# Altium PCB esp32.PcbDoc (part 3 of 3)
Units mil, origin at the board's own origin, x right, y up, seen from the top; angles counter-clockwise.
Board outline 2755 x 1098 mil, 4 copper layers (L1, L2, L3, L4), stack 61.745 mil thick; 63 components, 73 nets, 303 pads, 170 vias.
Unrouted connection lines stored in the file: 4.
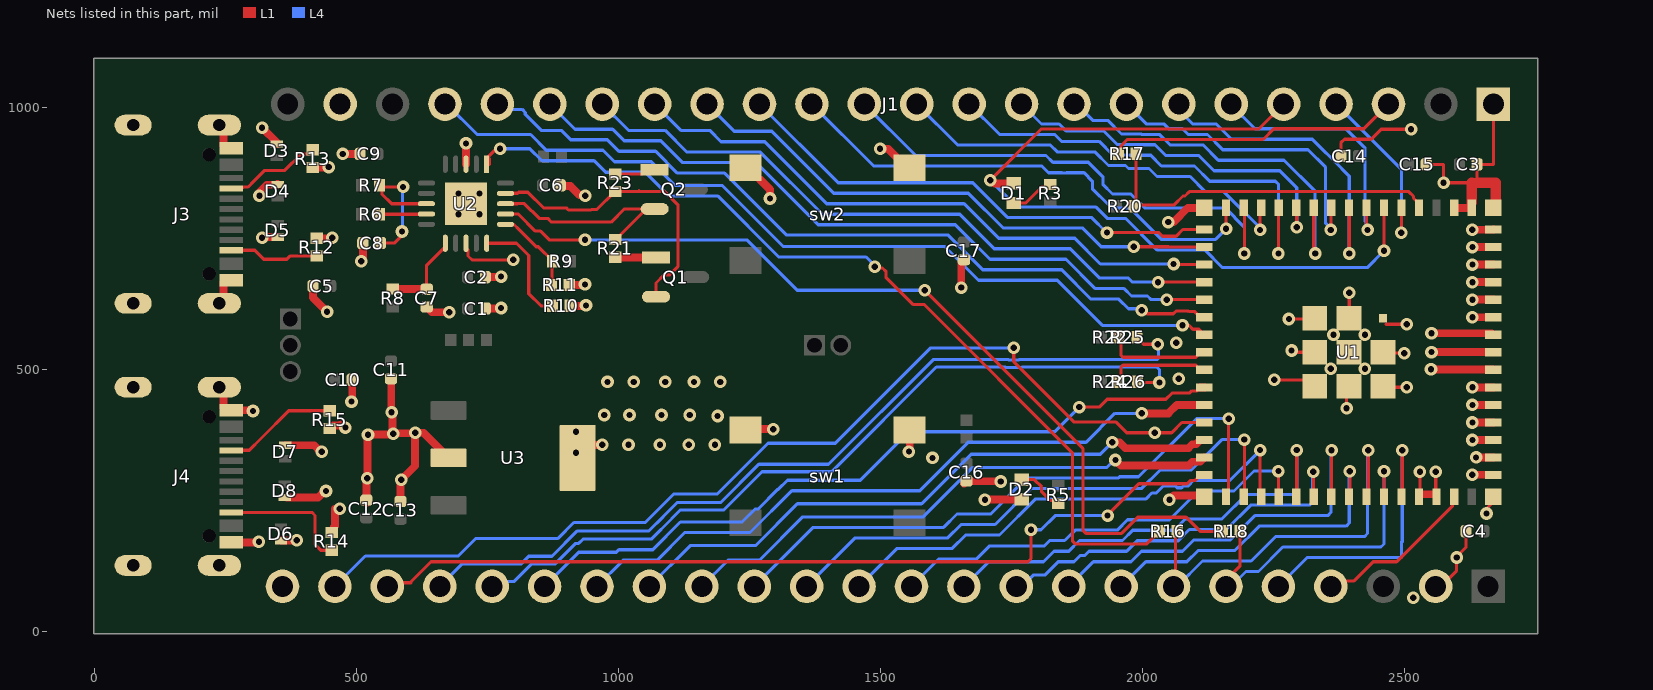
[diagram p4: the nets of this part, all layers, seen from the top]

## Via types
v1: diameter 24, hole 12, L1 to L4, tented both sides, 169 vias
v2: diameter 24/24/24 (per signal layer), hole 12, L1 to L4, tented both sides, 1 vias

## Nets (pads, with @x,y where several pads share a name; then routed paths per layer and width w, separated by ;. In a path a pad name is that pad's centre, name@x,y a point inside that pad or via, vN(x,y) a via of type N, cw(c..) or ccw(c..) an arc to the next point about the centre after c; other vN are vias at no path point) (continued)
CON_ESP_USB_N: pad.21 R25.1 | length 1626.1
  L1 w6.23: R25.1@1989,561 1989,559.82 1996.51,552.3 1997.7,552.3 2002,548 v1(2029,548)
  L4 w6: pad.21@659,86 702.11,129.11 807.89,129.11 808.49,128.51 813.65,128.51 828.48,143.35 873,143.35 921.43,191.78 1058.22,191.78 1085.05,218.6 1085.05,219.17 1111.88,246 1195,246 1267.84,318.85 1400.72,318.85 1600.49,518.61 1743.7,518.61 1744.43,517.89 1763.57,517.89 1764.3,518.61 2026.85,518.61 2030.5,522.26 2030.5,546.5 v1(2029,548)
CON_ESP_USB_P: pad.20 R26.1 | length 1531.7
  L1 w6.23: R26.1@1990,476 1991,475 v1(2032,475)
  L4 w6: pad.20@759,101.63 pad.20@759,86 768.09,95.09 800.34,95.09 834.37,129.11 879.33,129.11 918.21,168 924,168 932.21,176.21 1062.79,176.21 1102,215.43 1102,216 1117.77,231.77 1200.89,231.77 1273.74,304.61 1406.61,304.61 1606.39,504.39 1737.8,504.39 1738.53,503.65 1769.47,503.65 1770.2,504.39 2026.85,504.39 2032,499.24 v1(2032,475)
CON_GPIO0: J1.3 R17.1 | length 560.2
  L1 w6: R17.1@1953.52,911.63 1959.15,917.26 1959.15,926.9 1970.69,938.45 2229.73,938.45 2250.28,959 2422,959 J1.3@2469,1006
DTR_FTDI: Q2.2 R21.2 U2.18 | length 387.3
  L1 w6: U2.18@790.04,815.66 790.38,816 806.93,816 807.16,816.23 820.49,816.23 848.72,788 865.18,788 872.18,781 985.85,781 1010.85,806 Q2.2@1053.17,806 ; R21.2@994,748.01 995.18,748.01 Q2.2@1053.17,806 ; Q2.2@1069,806 Q2.2@1053.17,806
ESP_USB_N: R22.2 R25.2 U1.23 | length 201.4
  L1 w6.23: R25.2@1954.98,561 1958.63,557.35 1958.63,526.57 1962.32,522.89 2040.38,522.89 2101.54,522.92 2105.19,526.57 2105.19,527.78 2109.94,532.54 U1.23@2117.82,532.54
ESP_USB_P: R24.2 R26.2 U1.24 | length 194.1
  L1 w6.23: R26.2@1955.98,476 1955.98,480.32 1958.63,482.97 1958.63,504.35 1962.28,508 2101.54,508 2105.19,504.35 2105.19,503.83 2109.94,499.07 U1.24@2117.82,499.07
FTDI_RESET: C7.2 R8.2 U2.11 | length 156.7
  L1 w6: C7.2@634,652.93 634,698.65 U2.11@666.48,731.13
  L1 w15: R8.2@569,653.01 R8.2@569,653.01 633.96,652.97 C7.2@634,652.93
FTDI_USB_N: R6.2 U2.9 | length 89.3
  L1 w6.23: R6.2@544,796 U2.9@633.27,796
FTDI_USB_P: C8.2 R7.2 U2.8 | length 297.5
  L1 w6.23: C8.2@545.93,741 572,741 587,756 v1(587,763) ; v1(589,848) 547,848 R7.2@544,851 548.81,846.19 548.81,834.19 567,816 609.63,816 U2.8@633.59,816
  L4 w6: v1(587,763) 588,764 588,847 v1(589,848)
GND: C1.1 C2.1 C3.1 C4.1 C5.1 C6.1 C7.1 C8.1 C9.1 C10.1 C11.1 C12.1 C13.1 C14.1 C15.1 C16.1 C17.1 D2.1 D3.1 D4.1 D5.1 D6.1 D7.1 D8.1 J1.1 J1.23 J3.A1B12 J3.B1A12 J3.S1 J3.S2 J3.S3 J3.S4 J4.A1B12 J4.B1A12 J4.S1 J4.S2 J4.S3 J4.S4 pad.2 pad.24 R10.1 R11.1 R12.1 R13.1 R14.1 R15.1 sw1.3 sw1.4 sw2.3 sw2.4 U1.1 U1.2 U1.42 U1.43 U1.46 U1.47 U1.48 U1.49 U1.50 U1.51 U1.52 U1.53 U1.54 U1.55 U1.56 U1.57 U1.58 U1.59 U1.60 U1.61 U1.62 U1.63 U1.64 U1.65 U1.66 U1.67 U1.68 U1.69 U1.70 U1.71 U1.72 U1.73 U2.3 U2.13 U2.21 U3.2 U3.4 | length 4624.7
  L1 w6: U2.13@712.91,728.72 712.91,716.38 720.71,708.58 798.72,708.58 v1(799,708.86) ; v1(2251,480) 2314.45,480 U1.73@2323.45,471 ; v1(2279,596) 2328.45,596 U1.71@2328.45,597.5 ; v1(2284,536) 2280.54,532.54 U1.72@2328.45,532.54 ; U1.72@2319.45,522 U1.72@2328.45,531 ; C14.1@2378.07,907 2378.07,932 2385.07,939 2435.8,939 2454.8,958 v1(2512,958) ; v1(2389,426) U1.70@2389,465.45 ; U1.69@2394,606.55 v1(2394,646) ; U1.67@2459.55,531 v1(2499,531) ; U1.68@2464.55,466 v1(2504,466) ; 2464.55,586 v1(2504,586) ; U1.42@2528.99,262.2 v1(2528.99,304.87) ; C15.1@2540.93,891 2574,891 v1(2574,856) 2627.66,856 2637.86,856 2637.86,890.86 C3.1@2638,891 2669,891 J1.1@2669,1006 ; pad.2@2559,86 2569,86 2599,116 v1(2599,141) 2599,143.04 2617.07,161.11 C4.1@2617.07,191 ; U1.43@2559,261.82 v1(2558.99,304.87) ; v1(2656,225) 2656,233.94 2679,256.94 U1.65@2669,256.94 ; U1.62@2669,808.13 U1.62@2674,808.13
  L1 w15: J4.S1@238.57,466.08 246.07,458.58 246.07,426.3 250.38,421.98 J4.A1B12@261.2,421.98 v1@301.29,421.98 ; J3.S2@238.57,625.92 246.07,633.42 246.07,665.7 250.38,670.02 J3.B1A12@261.2,670.02 ; J3.S1@238.57,966.08 246.07,958.58 246.07,926.3 250.38,921.98 J3.A1B12@261.2,921.98 ; J4.B1A12@261.2,170.02 v1@314,170.02 ; v1(315,831) 315,837.75 329.44,852.18 349.39,852.18 D4.1@350,852.8 D4.1@349.39,853.41 ; v1@320,752.2 D5.1@350,752.2 ; v1(320,961) 348,933 D3.1@348,929.8 ; D6.1@356,173.2 v1@386,173.2 ; D7.1@364,355.18 419.38,355.18 431.56,343 v1(434,343) ; D8.1@367.31,255.41 426.97,255.41 439.56,268 v1(442,268) ; R13.1@417,884.99 v1@447,884.99 ; C5.1@417.14,659 417.14,636.86 v1(444,610) ; R12.1@424,750.02 v1@454,750.02 ; R15.1@449,386.99 454.89,392.88 468.06,392.88 470.18,395 473,395 v1(479,389) ; R14.1@453,189.02 454.18,189.02 457.31,192.15 457.31,199.24 459,200.93 v1@459,234 ; v1(474,911) C9.1@507.07,911 ; v1@491.93,439.92 C10.1@491.93,480 ; v1(509,706) 509,708.44 512.56,712 512.56,736.69 512.07,737.18 C8.1@512.07,741 ; C12.1@519,245.13 C12.1@519,250.57 v1@519,290.65 ; v1(520.4,292.05) 521.2,292.85 521.2,374.2 v1(522,375) 523,376 569,376 v1(570,377) ; C11.1@566,482.07 566.5,481.57 566.5,418.5 v1(567,418) 568.5,416.5 568.5,378.5 v1(570,377) ; C13.1@584,247.93 v1@584,288.01 ; v1(585.4,289.41) 612,316.01 v1(612,379) ; C7.1@634,619.07 644.07,609 v1(677,609) ; U3.2@675.97,331 627.97,379 v1(612,379) ; U2.3@709,891.41 v1@709,920.43 ; C1.1@745.93,616 v1@775.93,616 ; C2.1@745.93,676 746.42,676.49 775.44,676.49 v1(775.93,676.98) ; C6.1@889,851 890.44,849.56 908.52,849.56 925.35,832.72 934.6,832.72 v1(936.33,831) ; R11.1@906.01,661 v1@936.01,661 ; R10.1@908.02,621 v1@938.02,621 ; v1(919,341) 919,346.02 928.98,356 v1(969,356) ; sw1.4@1242.5,384.58 1243.92,386 v1(1295,386) ; sw2.4@1242.5,884.58 1247.43,884.58 1289,843.01 v1(1289,826) ; v1(1499,921) 1514.16,921 1550.57,884.58 sw2.3@1555.5,884.58 ; v1@1555.5,344.5 sw1.3@1555.5,384.58 ; v1(1654,656) 1654,704.07 1654.69,704.76 1654.69,705.94 1657.82,709.07 C17.1@1659,709.07 ; C16.1@1659,282.14 C16.1@1664,287.14 1664.57,286.57 1728.43,286.57 v1(1729,286) ; v1(1699,251) 1699.65,251.65 1768.35,251.65 D2.1@1769,252.3 ; v1(2049,781) 2059,781 2086.13,808.13 U1.63@2117.82,808.13 ; v1(2051,251) 2059.28,259.28 2115.49,259.28 U1.64@2117.82,256.94 ; U1.42@2527.27,256.94 2527.27,261.44 2527.64,261.82 U1.43@2559,261.82 ; v1(2550,500) 2668.07,500 U1.52@2669,499.07 ; v1(2551,533) 2668.54,533 U1.53@2669,532.54 ; v1(2551,569) 2666,569 U1.54@2669,566 ; U1.2@2594.2,808.13 U1.1@2627.66,808.13 ; v1(2628.66,766.41) 2668.63,766.41 U1.60@2669,766.79 ; v1(2629,299) 2668.28,299 U1.46@2669,298.28 ; v1(2629.03,365.21) U1.48@2669,365.21 ; v1(2629.03,398.68) U1.49@2669,398.68 ; v1(2629.03,432.14) U1.50@2669,432.14 ; v1(2629.03,465.61) U1.51@2669,465.61 ; v1(2629.03,599.46) U1.55@2669,599.46 ; v1(2629.03,632.93) U1.56@2669,632.93 ; v1(2629.03,666.39) U1.57@2669,666.39 ; v1(2629.03,699.86) U1.58@2669,699.86 ; v1(2629.03,733.32) U1.59@2669,733.32 ; v1(2636,332) 2668.75,332 U1.47@2669,331.75 ; v1(570,377) 571,378 611,378 v1(612,379)
  L1 w20: U1.1@2627.66,819 2627.66,856 ; 2637.86,856 2674,856 U1.62@2674,808.13
  other v1: 2516,64 314,171 386,174.19 468,234 1599,331 1554.1,343.1 1019,356 1079,356 1134,356 1184,356 919,381 1189,411 973,413 1021,413 1082,413 1136,413 302.68,420.59 490.53,438.52 979,476 1029,476 1089,476 1144,476 1194,476 2069,482 2359,501 2424,501 2064,551 2364,566 2424,566 775.93,616.98 938.02,621.98 936.01,661.98 320,751.22 454,751 694.63,795.66 734.63,795.66 694.63,835.66 734.63,835.66 447,885.98 709,931
GPIO0: R17.2 R20.2 U1.4 | length 672.1
  L1 w6: R20.2@1984,811 R20.2@1987.53,814.53 ; R17.2@1987.53,911.63 R20.2@1987.53,814.53 ; U1.4@2527.27,808.13 2524.39,811 2524.39,818.87 2516.68,826.59 2516.68,830.09 2507.76,839 2089,839 2080.63,830.63 2076.81,830.63 2059.91,813.73 1988.34,813.73 R20.2@1987.53,814.53
GPIO1: J1.4 U1.5 | length 344.8
  L1 w6: v1(2493.5,760.5) 2493.65,760.65 2493.65,807.98 U1.5@2493.8,808.13
  L4 w6: J1.4@2369,1006 2493.5,881.5 v1(2493.5,760.5)
GPIO2: D1.1 J1.5 U1.6 | length 1583.5
  L1 w6: v1(1709,861) 1806.45,958.45 2221.45,958.45 J1.5@2269,1006 ; v1@2460.34,726.2 U1.6@2460.34,808.13
  L1 w15: v1(1709,861) 1711.44,861 1717.72,854.72 D1.1@1754,854.7
  L4 w6: v1(1709,861) 1760,810 1910.26,810 1932.26,788 1967.18,788 2027.18,728 2118.17,728 2152.17,694 2428.34,694 v1(2460.44,726.1)
GPIO3: J1.6 U1.7 | length 492.4
  L1 w6: U1.7@2426.87,808.13 2426.87,768.13 v1(2429,766)
  L4 w6: J1.6@2169,1006 2169,1004.18 2214.18,959 2387.72,959 2424,922.72 2424,783 2426.32,780.68 2426.32,768.68 v1(2429,766)
GPIO4: J1.7 U1.8 | length 624.2
  L1 w6: U1.8@2393.41,808.13 2394,807.54 2394,741 v1(2394,721)
  L4 w6: J1.7@2069,1006 2069,994.18 2095.18,968 2140.53,968 2169.53,939 2323.72,939 2379.38,883.34 2380,883.34 2380,882.56 2394,868.56 v1(2394,721)
GPIO5: J1.8 U1.9 | length 596
  L1 w6: v1(2359,766) 2359,807.18 U1.9@2359.94,808.13
  L4 w6: J1.8@1969,1006 2006.62,968.38 2040.16,968.38 2049.53,959 2075.9,959 2086.9,948 2123.72,948 2152.72,919 2315.43,919 2349,885.43 2349,778.86 2359,768.86 v1(2359,766)
GPIO6: J1.9 U1.10 | length 735.8
  L1 w6: U1.10@2326.48,808.13 2326.48,723.52 v1(2329,721)
  L4 w6: J1.9@1869,1006 1873.47,1006 1904.47,975 1933.53,975 1959.53,949 1997.72,949 1998.34,948.38 2031.87,948.38 2052.25,928 2115.43,928 2144.43,899 2269.71,899 2329,839.71 v1(2329,721)
GPIO7: J1.10 U1.11 | length 704.1
  L1 w6: U1.11@2293.02,808.13 2294,807.14 v1(2294,771)
  L4 w6: J1.10@1769,1006 1807,968 1840.53,968 1853.53,955 1925.25,955 1951.25,929 1989.43,929 1990.06,928.38 2023.59,928.38 2043.96,908 2107.15,908 2136.15,879 2261.43,879 2294,846.43 v1(2294,771)
GPIO8: J1.11 U1.12 | length 872.8
  L1 w6: v1(2259,721) 2259.28,721.28 2259.28,807.85 U1.12@2259.55,808.13
  L4 w6: J1.11@1669,1006 1727,948 1832.25,948 1845.25,935 1916.96,935 1942.96,909 1975.47,909 1976.09,908.38 2015.3,908.38 2035.68,888 2098.86,888 2127.86,859 2253.14,859 2259,853.14 v1(2259,721)
GPIO9: J1.12 U1.13 | length 799.6
  L1 w6: v1(2224,766) 2224,806.04 U1.13@2226.09,808.13
  L4 w6: J1.12@1569,1006 1647,928 1823.96,928 1836.96,915 1908.68,915 1934.68,889 1967.18,889 1972.91,883.28 2012.12,883.28 2027.4,868 2090.58,868 2119.58,839 2154.71,839 2224,769.71 v1(2224,766)
GPIO10: J1.13 U1.14 | length 968.9
  L1 w6: U1.14@2192.62,808.13 2194,806.75 v1(2194,721)
  L4 w6: J1.13@1469,1006 1567,908 1815.68,908 1828.68,895 1896.47,895 1924,867.47 1924,852.83 1942.33,834.5 1977.25,834.5 2003.75,808 2157.43,808 2194,771.43 v1(2194,721)
GPIO11: J1.14 U1.15 | length 954.3
  L1 w6: v2(2159.16,768.09) U1.15@2159.16,808.13
  L4 w6: J1.14@1369,1006 1487,888 1807.4,888 1820.4,875 1846,875 1846.36,874.64 1854.64,874.64 1855,875 1888.18,875 1904,859.18 1904,844.55 1934.05,814.5 1936.79,814.5 1943.29,808 1975.47,808 2035.47,748 2139.07,748 v2(2159.16,768.09)
GPIO12: J1.15 U1.16 | length 958.5
  L1 w6: v1(1932,761) 2030.82,761 2037.82,754 2063.82,754 2076.61,766.79 U1.16@2117.82,766.79
  L4 w6: J1.15@1269,1006 1419,856 1675.82,856 1741.82,790 1901.98,790 1930.98,761 v1(1932,761)
GPIO13: J1.16 U1.17 | length 1061.8
  L1 w6: v1(1983,734) 2049,734 2049.68,733.32 U1.17@2117.82,733.32
  L4 w6: J1.16@1169,1006 1220.64,954.36 1292.36,954.36 1410.72,836 1667.53,836 1733.53,770 1884.82,770 1920.82,734 v1(1983,734)
GPIO14: J1.17 U1.18 | length 1175.6
  L1 w6: v1(2059,701) 2060.14,699.86 U1.18@2117.82,699.86
  L4 w6: J1.17@1069,1006 1119,956 1174,956 1195.64,934.36 1279,934.36 1397.36,816 1659.25,816 1725.25,750 1870.32,750 1919.32,701 v1(2059,701)
GPIO15: J1.18 U1.19 | length 1290
  L1 w6: v1@2029,666 v1(2029.39,666.39) U1.19@2117.82,666.39
  L4 w6: J1.18@969,1006 1019,956 1089,956 1130.64,914.36 1270.72,914.36 1389.07,796 1650.96,796 1716.96,730 1862.04,730 1918.04,674 1972.91,674 1980.52,666.39 v1(2029.39,666.39)
GPIO16: J1.19 U1.20 | length 1403.3
  L1 w6: v1(2046,633) v1(2046,633) U1.20@2117.78,632.96 ; U1.20@2117.78,632.96 U1.20@2117.82,632.93
  L4 w6: J1.19@869,1006 917,958 988.72,958 1010.72,936 1080.72,936 1122.36,894.36 1262.43,894.36 1380.79,776 1642.68,776 1708.68,710 1853.75,710 1909.75,654 1964.63,654 1978.63,640 2009.18,640 2016.18,633 v1(2046,633)
GPIO17: J1.20 U1.21 | length 1523.5
  L1 w6: v1(1998,613) 2001.79,613 2008.79,606 2058.5,606 2063.5,611 2087.18,611 2088.13,610.06 2099.35,610.06 2109.94,599.46 U1.21@2117.82,599.46
  L4 w6: J1.20@769,1006 779,996 816.14,996 822,990.14 822,986.53 852.53,956 890.72,956 908.72,938 978.72,938 1000.72,916 1070.72,916 1112.36,874.36 1202.46,874.36 1320.82,756 1629,756 1695,690 1845.47,690 1901.47,634 1954.63,634 1972.95,615.68 1995.32,615.68 v1(1998,613)
GPIO18: J1.21 U1.22 | length 1631.1
  L1 w6: v1(2076,584) 2088.45,584 2095.86,576.59 2107.23,576.59 U1.22@2117.82,566
  L4 w6: J1.21@669,1006 672.18,1006 730.18,948 832.25,948 862.25,918 970.43,918 992.43,896 1062.43,896 1107.43,851 1197.53,851 1314.17,734.36 1622.36,734.36 1686.72,670 1837.18,670 1923.18,584 v1(2076,584)
GPIO21: pad.19 U1.25 | length 1416.1
  L1 w6: v1(1879,428) 1917.28,428 1932.28,443 2044.18,443 2055.82,454.64 2089.45,454.64 2091.95,457.14 2093.81,459 2103.34,459 U1.25@2109.57,465.23
  L1 w15: U1.25@2109.57,465.23 2117.44,465.23 U1.25@2117.82,465.61
  L4 w6: pad.19@859,86 924,151 995.72,151 1000.64,155.93 1065.29,155.93 1118.04,208.68 1235.61,208.68 1260.57,233.63 1266.63,233.63 1304,271 1305.01,271 1322.51,288.5 1461.31,288.5 1553.81,381 1717.38,381 1775.7,381 1832,381 v1(1879,428)
GPIO26: pad.18 U1.26 | length 1302.2
  L1 w15: v1(1998,416) 2049,416 2065.14,432.14 U1.26@2117.82,432.14
  L4 w6: pad.18@959,86 1008.93,135.93 1073.57,135.93 1126.32,188.68 1250.97,188.68 1330.79,268.5 1574.68,268.5 1667.18,361 1892,361 1947,416 v1(1998,416)
GPIO33: pad.17 U1.28 | length 1184
  L1 w15: v1(1942,361) 1955.72,361 1967.22,349.5 2087.2,349.5 2094.82,357.12 2101.85,357.12 2109.94,365.21 U1.28@2117.82,365.21
  L4 w6: pad.17@1059,86 1136.68,163.68 1261.32,163.68 1341.14,243.5 1578.22,243.5 1672.72,338 1919,338 v1(1942,361)
GPIO34: pad.16 U1.29 | length 1069.4
  L1 w15: v1(1948,327) 1958.63,316.37 2087.54,316.37 2094.82,323.66 2109.73,323.66 U1.29@2117.82,331.75
  L4 w6: pad.16@1159,86 1209,136 1269,136 1351.5,218.5 1581.5,218.5 1676,313 1932,313 1946,327 v1(1948,327)
GPIO35: pad.15 U1.31 | length 1188.7
  L1 w6: U1.31@2159,256.94 2164,261.94 v1(2164,406)
  L4 w6: pad.15@1259,86 1371.5,198.5 1620.18,198.5 1645.68,224 1710.18,224 1779.18,293 1954.18,293 1956.18,295 1992,295 2103,406 v1(2164,406)
GPIO36: pad.14 U1.32 | length 1060.6
  L1 w6: U1.32@2192.62,256.94 2194,258.32 v1(2194,366)
  L4 w6: pad.14@1359,86 1451.5,178.5 1628.46,178.5 1653.96,204 1718.47,204 1787.47,273 1998.28,273 2033.28,308 2093.14,308 2151.14,366 v1(2194,366)
GPIO37: pad.13 U1.33 | length 964.9
  L1 w6: U1.33@2224,256.94 v1(2224,346)
  L4 w6: pad.13@1459,86 1531.5,158.5 1636.75,158.5 1662.25,184 1726.75,184 1795.75,253 2006.57,253 2017.57,264 2025.82,264 2039.82,278 2062.18,278 2065.95,274.23 2074.23,274.23 2078,278 2087,278 2097,288 2166,288 v1(2224,346)
GPIO38: pad.12 U1.34 | length 833.8
  L1 w6: U1.34@2259,263.32 v1(2259,306)
  L4 w6: pad.12@1559,86 1611.5,138.5 1683.22,138.5 1707.9,163.19 1812.62,163.19 1822.81,173.38 1851.09,173.38 1871.09,193.38 1951.38,193.38 1971,213 2051.18,213 2106.18,268 2174.28,268 2212.28,306 v1(2259,306)
GPIO39: pad.11 U1.35 | length 878.5
  L1 w6: U1.35@2293.02,256.94 2294,257.93 v1(2294,346)
  L4 w6: pad.11@1659,86 1706,133 1810.72,133 1830.72,153 1859,153 1879.38,173.38 1961.52,173.38 1981.15,193 2059.47,193 2080.87,214.4 2150.98,214.4 2197.58,261 2288.14,261 2294,266.86 v1(2294,346)
GPIO40: pad.10 U1.36 | length 737.7
  L1 w6: v1(2325.56,304.44) 2326.02,303.98 2326.02,257.41 U1.36@2326.48,256.94
  L4 w6: pad.10@1759,86 1769.86,86 1791.86,108 1814,108 1839,133 1869,133 1881,145 1889.72,145 1897.72,153 1969.43,153 1989.43,173 2067.75,173 2089.15,194.4 2159.26,194.4 2205.86,241 2318.14,241 2324,246.86 2324,302.89 v1(2325.56,304.44)
GPIO41: pad.9 U1.37 | length 766.9
  L1 w6: U1.37@2360.33,256.76 2360.33,256.94 v1(2360.33,345.82)
  L4 w6: pad.9@1859,86 1906,133 1977.72,133 1997.72,153 2076.04,153 2097.44,174.4 2167.55,174.4 2214.15,221 2353.14,221 2359,226.86 2359,344.49 v1(2360.33,345.82)
GPIO42: pad.8 U1.38 | length 627.2
  L1 w6: U1.38@2395.33,263.14 v1(2395.33,305.82)
  L4 w6: pad.8@1959,86 2006,133 2084.32,133 2105.72,154.4 2175.83,154.4 2222.43,201 2388.14,201 2394,206.86 2394,304.49 v1(2395.33,305.82)
GPIO45: pad.5 U1.41 | length 552
  L1 w6: U1.41@2495.33,257.75 v1(2495.33,345.82)
  L4 w6: pad.5@2259,86 2314,141 2494,141 2494,171 2495.33,171 v1(2495.33,345.82)
GPIO46: pad.4 U1.44 | length 314.3
  L1 w6: pad.4@2359,86 2369,96 2402.53,96 2439.53,133 2484.43,133 2591.32,239.89 2591.32,254.07 U1.44@2594.2,256.94
GPIO47: pad.23 U1.27 | length 1937.9
  L1 w6: v1(1754,541) 1754,514.82 1869.57,399.25 1949.29,399.25 1969.54,379 v1(2023,379) 2055.2,379 2074.87,398.68 U1.27@2117.82,398.68
  L4 w6: pad.23@459,86 517,144 694.21,144 727.21,177 883.86,177 914.76,207.89 1050.98,207.89 1105.2,262.11 1188.33,262.11 1285.21,359 1413.79,359 1595.79,541 v1(1754,541)
GPIO48: pad.22 U1.30 | length 1669.7
  L1 w6: pad.22@559,86 566,93 604,93 604,94.64 642.36,133 1781.14,133 1787,138.86 v1(1787,194) ; v1@1940,229 1992.78,281.78 2084.76,281.78 2090.68,287.69 2099.35,287.69 2109.94,298.28 U1.30@2117.82,298.28
  L4 w6: v1(1787,194) 1806,194 1833,221 v1(1933,221)
NetD1_2: D1.2 R3.1 | length 84.8
  L1 w6: D1.2@1754,817.3 1776.92,817.3 1807,847.38 1818.37,847.38 R3.1@1824,853.01
NetD2_2: D2.2 R5.1 | length 94.6
  L1 w6: D2.2@1769,289.7 1793.29,289.7 1807.13,275.86 1807.13,266.22 1823.73,249.62 1833.37,249.62 R5.1@1839,243.99
NetJ3_A5: J3.A5 R13.2 | length 186.4
  L1 w6: J3.A5@261.2,845.21 262.11,846.12 282.83,846.12 284.7,847.99 293.43,847.99 304,858.57 324.94,879.5 363.21,879.5 394.33,910.62 407.43,910.62 415.82,919.01 R13.2@417,919.01
NetJ3_B5: J3.B5 R12.2 | length 172.4
  L1 w6: J3.B5@261.2,727.1 305.93,727.1 323.04,710 367,710 373,716 R12.2@424,716
NetJ4_A5: J4.A5 R15.2 | length 219.2
  L1 w6: J4.A5@261.2,345.21 261.59,345.6 295.57,345.6 319,369.02 370.98,421.01 R15.2@449,421.01
NetJ4_B5: J4.B5 R14.2 | length 254
  L1 w6: J4.B5@261.2,227.1 415.14,227.1 421,221.24 421,166.05 432.05,155 R14.2@453,155
NetQ1_1: Q1.1 R21.1 | length 77.8
  L1 w15: R21.1@994,713.99 994.3,713.7 1071.28,713.7 Q1.1@1071.58,713.4
NetQ2_1: Q2.1 R23.1 | length 78.2
  L1 w6: R23.1@994,873.01 1045.75,873.01 1053.55,880.8 Q2.1@1069,880.8
NetR10_2: R10.2 U2.15 | length 217.8
  L1 w6: U2.15@748.37,740.59 805.46,740.59 828.84,717.21 828.84,644.38 852.22,621 R10.2@874,621
RTS_FTDI: Q1.2 R23.2 U2.19 | length 577.3
  L1 w6: U2.19@778.74,835.34 U2.19@784.41,835.34 ; U2.19@795.94,835.91 807.54,835.91 809.63,838 827,838 857,808 900.25,808 904.25,804 947.51,804 948.51,805 958.83,805 992.82,838.99 R23.2@994,838.99 1036.99,838.99 ; 1039,841 1036.99,838.99 ; Q1.2@1059.02,638.6 Q1.2@1071.58,638.6 1071.58,664.86 1087.11,680.39 1097.76,680.39 1113.29,695.93 1113.29,814.3 1088.6,838.99 1036.99,838.99
RXD_FTDI: R16.2 U2.1 | length 1730.9
  L1 w6: U2.1@748.37,902.72 766.65,921 v1(774,921) ; 754,891.07 754,902.38 ; v1(1489,696) 1491.68,693.32 1503.75,693.32 1509.98,687.08 1509.98,675.61 1561.6,624 1582.72,624 1865.81,340.9 1865.81,172.86 1871.67,167 2007.99,167 R16.2@2031.99,191
  L4 w6: v1(774,921) 830.96,921 853.96,898 953.47,898 975.47,876 1050.72,876 1095.72,831 1189,831 1305.64,714.36 1472.36,714.36 1489,697.72 v1(1489,696)
TXD_FTDI: R18.2 U2.17 | length 1723.8
  L1 w6: U2.17@795.94,796.23 808.87,796.23 809.63,795.47 841.42,763.68 851.32,763.68 868,747 v1(936,747) ; v1(1584,651) 1885.81,349.19 1885.81,192.86 1891.67,187 1959.85,187 1990.67,217.81 2082.85,217.81 2109.66,191 R18.2@2151.99,191
  L4 w6: v1(936,747) 1244.72,747 1340.72,651 v1(1584,651)
U0RXD: pad.6 R18.1 U1.40 | length 632.6
  L1 w6: pad.6@2159,86 2159,98.45 2186.01,125.46 R18.1@2186.01,191 ; U1.40@2460.33,263.14 v1(2460.33,305.82)
  L4 w6: pad.6@2159,86 2168.67,86 2197.07,114.4 2220.93,114.4 2267.53,161 2454.47,161 2460.33,166.86 v1(2460.33,305.82)
U0TXD: pad.7 R16.1 U1.39 | length 767.3
  L1 w6: pad.7@2059,86 2062.5,89.5 2062.5,187.5 R16.1@2066.01,191 ; U1.39@2430.33,257.75 v1(2430.33,345.82)
  L4 w6: pad.7@2059,86 2065.6,86 2114,134.4 2206.79,134.4 2253.39,181 2423.14,181 2429,186.86 2429,344.49 v1(2430.33,345.82)
"VBUS SENSE": R9.1 R11.2 U2.16 | length 159.6
  L1 w6: U2.16@790.04,776.29 800.53,776.29 809.63,767.19 842.82,734 847.18,734 874,707.18 R9.1@874,706 873,705 873,662 R11.2@871.99,661
pads on no net: J1.24 J3. J3.A8 J3.B8 J4. J4.A8 J4.B8 U2.2 U2.4 U2.5 U2.6 U2.7 U2.14

## Polygon pours and split planes (outlines as drawn)
GND on L1 "GND_L01_P010" (solid, pour order 10): 728,390 501,390 495,396 495,245 506,234 613,234 623,244 623,277 851,277 887,241 1039,241 1130,332 1307,332 1307,545 1303,549 934,549 774,389 716,389
GND on L1 "GND_L01_P008" (solid, pour order 8): 2202,662 2521,662 2526,657 2526,409 2527,408 2209,408 2202,409 2202,405
+5V_VBUS2 on L1 "+5V_VBUS2_L01_P007" (solid, pour order 7): 343,518 465,518 472,511 472,461 343,461
+5V on L1 "+5V_L01_P006" (solid, pour order 6): 343,569 395,569 404.59,547 564.87,547 615,500 615,449 620,444 721,444 722,443 722,397 618,397 587,428 587,490.4 543.42,527 382,527 343,527 343,567 342,568
+3V3_REG on L1 "+3V3_REG_L01_P005" (solid, pour order 5): 491,167 491,227 631,227 637,233 637,264 726,264 727,265 727,203 676,152 504,152 490,166
+3V3_FTDI on L1 "+3V3_FTDI_L01_P004" (solid, pour order 4): 594,633 596,631 596,607 589,600 513,600 494,619 494,658.04 505,671 558.5,724.5 567.2,733.2 588,712.4 530.21,658.04 530.21,631
+3V3_FTDI on L1 "+3V3_FTDI_L01_P003" (solid, pour order 3): 866,836 866,922 825,922 803,900 803,847 831,847 842,836
+3V3 on L1 "+3V3_L01_P000" (solid, pour order 0): 2469,924 2469,946 2471,948 2493,948 2517,924 2517,876 2515,878 2487,878 2467,858 2436,858 2436,891 2403,891 2400,894 2400,924 2402,924
GND on L2 "GND_L02_P011" (solid, pour order 11): 18,28 21,31 2721,31 2721,1069 2719,1071 17,1071 17,34 13,30
GND on L3 (split plane): 2733.9,16.1 19.1,16.1 19.1,1073.9 2733.9,1073.9

## Silkscreen, mask and mechanical layers (free items; w line width, h text height)
Top Overlay:
  lines w10: 757,1 757,41 ; 770,1054 770,1094 ; 1255.53,2.65 1255.53,42.65 ; 1269,1055 1269,1095 ; 1758.53,3.65 1758.53,43.65 ; 1770,1055 1770,1095 ; 2256.53,7.65 2256.53,36 ; 2270,1054 2270,1094
  text "J1" at -41,1580 h40
  text "J1" at 2263,914 h40
  text "USER" at 1719,749 h20
  text "BOOT/USR" at 1307,687 h20
  text "USB1" at 424,592 h20
  text "UART" at 21,551 h40
  text "+5V" at 427,547 h20
  text "REG" at 1237,535 h30
  text "3V3" at 1482,531 h30
  text "USB2" at 430,513 h20
  text "ESP" at 134,493 h40
  text "RESET" at 1362,428 h20
  text "POWER" at 1765,331 h20
  text "J2" at 2321,143 h40
Bottom Overlay:
  lines w10: 294,18 294,158 2724,158 2724,88.5 2724,63.5 2724,18 294,18
  text "NC" at 386,921 h40 r90
  text "GND" at 488,919 h40 r90
  text "I015" at 990,919 h40 r90
  text "I09" at 1590,919 h40 r90
  text "107" at 1785,919 h40 r90
  text "105" at 1986,919 h40 r90
  text "104" at 2085,919 h40 r90
  text "103" at 2188,919 h40 r90
  text "102" at 2285,919 h40 r90
  text "3V3" at 2592,919 h40 r90
  text "GND" at 2699,918 h40 r90
  text "5V" at 588,917 h40 r90
  text "I018" at 691,917 h40 r90
  text "I014" at 1090,917 h40 r90
  text "I013" at 1193,917 h40 r90
  text "I00" at 2486,917 h40 r90
  text "I010" at 1492,916 h40 r90
  text "I08" at 1687,916 h40 r90
  text "106" at 1873,916 h40 r90
  text "I017" at 793,915 h40 r90
  text "I012" at 1295,915 h40 r90
  text "I011" at 1394,915 h40 r90
  text "101" at 2380,914 h40 r90
  text "I016" at 893,911 h40 r90
  text "<--PIN1-->" at 2710,730 h40 r90
  text "GND" at 381,322 h40 r90
  text "I047" at 481,322 h40 r90
  text "I048" at 581,322 h40 r90
  text "USB-" at 681,322 h40 r90
  text "USB+" at 781,322 h40 r90
  text "I021" at 881,322 h40 r90
  text "I026" at 981,322 h40 r90
  text "I033" at 1081,322 h40 r90
  text "I034" at 1181,322 h40 r90
  text "I035" at 1281,322 h40 r90
  text "I036" at 1381,322 h40 r90
  text "I037" at 1481,322 h40 r90
  text "I038" at 1581,322 h40 r90
  text "I039" at 1681,322 h40 r90
  text "I040" at 1781,322 h40 r90
  text "I041" at 1881,322 h40 r90
  text "I042" at 1981,322 h40 r90
  text "TXD" at 2081,322 h40 r90
  text "RXD" at 2181,322 h40 r90
  text "I045" at 2281,322 h40 r90
  text "I046" at 2381,322 h40 r90
  text "EN" at 2481,322 h40 r90
  text "GND" at 2581,322 h40 r90
  text "+3V3" at 2681,322 h40 r90
  text "1" at 2723,176 h40
Board:
  lines w20: -3,-3 2756,7 2753,1092 -2,1095 4,3

## Text inside footprints (layer, text, board x,y; h text height)
J1: Bottom Overlay "1" at 2620,1221 h40
J6: Top Overlay "1" at 298,583 h30